# Altium PCB PCB_Link screen_2022-08-21.pcbdoc
Units mil, origin at the board's own origin, x right, y up, seen from the top; angles counter-clockwise.
Board outline 5110 x 2970 mil, 2 copper layers (Top Layer, Bottom Layer); 78 components, 68 nets, 294 pads, 133 vias.
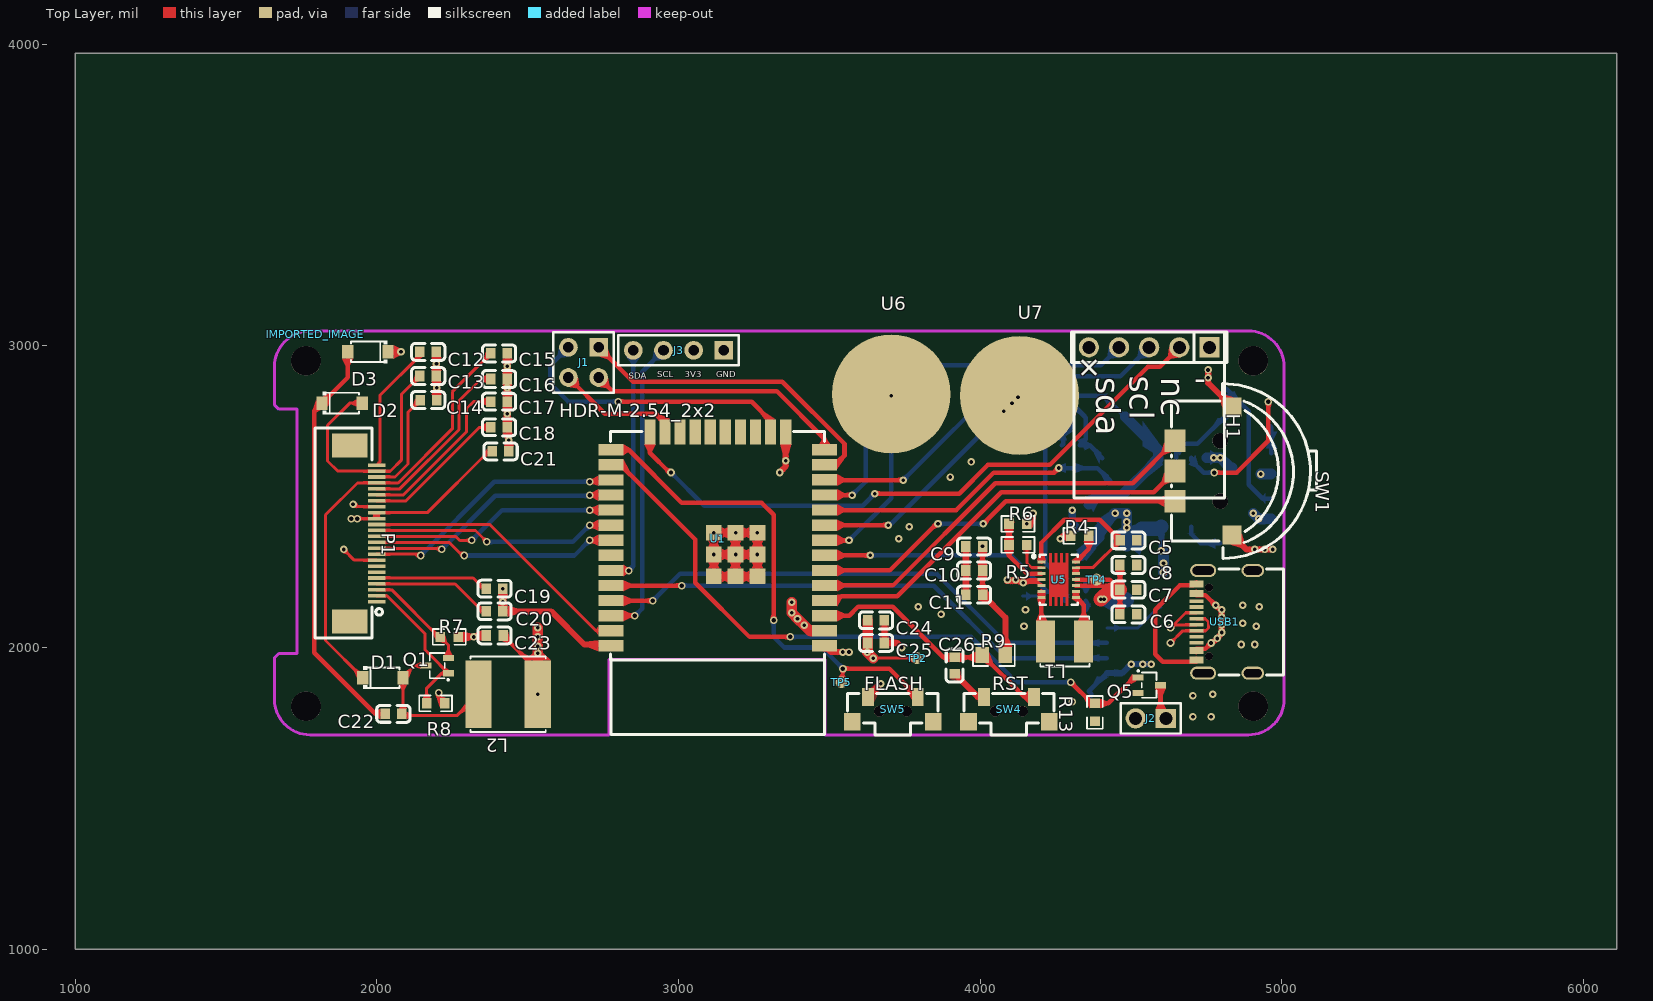
[diagram p0: Top Layer view]
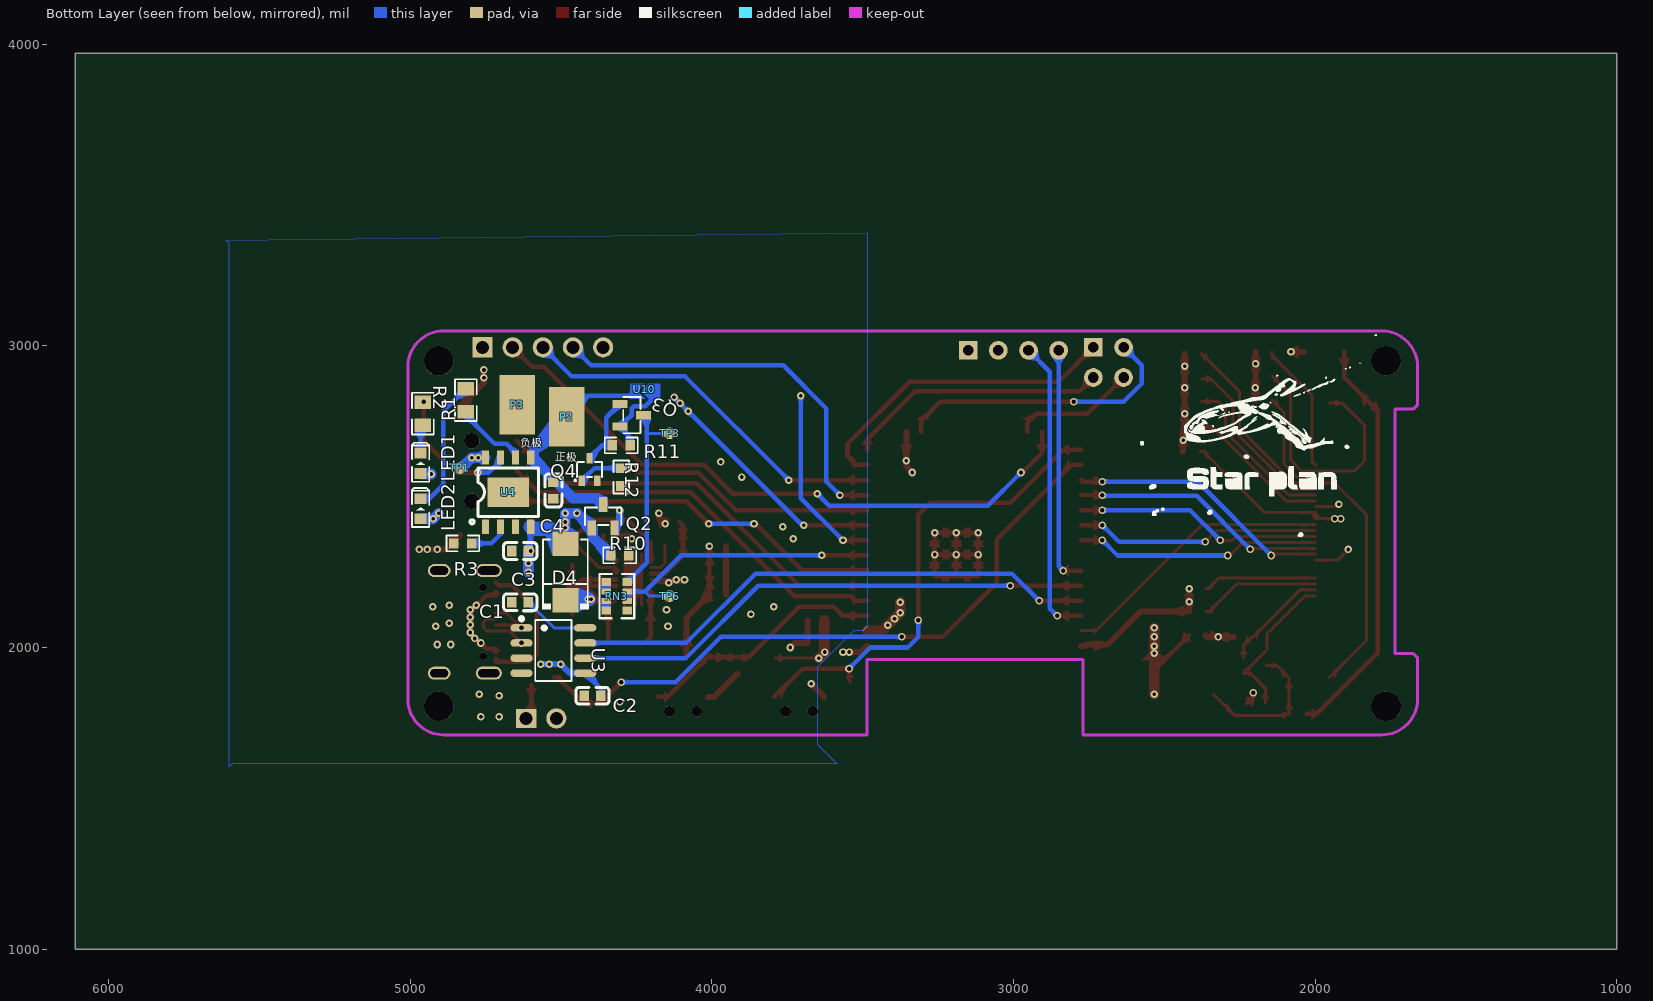
[diagram p1: Bottom Layer view, seen from below]

## Layer stack, top to bottom
Top Layer: signal copper (thickness not stored)
Dielectric: dielectric 12.6, FR-4, Dk 4.8
Bottom Layer: signal copper (thickness not stored)

## Board outline
6110,1000 1000,1000 1000,3970 6110,3970

## Components (designator, comment, footprint, x,y, rotation, side; value= is the part's Value field where it differs from the comment)
C1 "0.1u" C0603#1 4635,2150 r180 bottom
C2 "0.1u" C0603#1 4395,1840 r0 bottom
C3 "0.1u" C0603#1 4635,2320 r180 bottom
C4 "0.1u" C0603#1 4525,2520 r90 bottom
C5 "0.1u" C0603#2 4491.22,2355.03 r0 top
C6 "10u" C0603#2 4490.61,2110.03 r180 top
C7 "10u" C0603#2 4490.61,2191.77 r180 top
C8 "10u" C0603#2 4490.61,2273.51 r180 top
C9 "22u" C0603#2 3980,2335 r0 top
C10 "22u" C0603#2 3980,2255 r0 top
C11 "22u" C0603#2 3980,2175 r0 top
C12 "1u" C0603#2 2170,2980 r180 top
C13 "1u" C0603#2 2170,2900 r180 top
C14 "1u" C0603#2 2170.61,2820 r0 top
C15 "1u" C0603#2 2405,2975 r180 top
C16 "1u" C0603#2 2405,2890 r180 top
C17 "1u" C0603#2 2405,2815 r180 top
C18 "1u" C0603#2 2405,2730 r180 top
C19 "1u" C0603#2 2390,2195 r180 top
C20 "1u" C0603#2 2390,2120 r180 top
C21 "0.1u" C0603#2 2410,2650 r180 top
C22 "4.7u" C0603#2 2055,1780 r0 top
C23 "4.7u" C0603#2 2390.61,2040 r0 top
C24 "22u" C0603#2 3655,2090 r0 top
C25 "0.1u" C0603#2 3655,2015 r0 top
C26 "0.1u" C0603#2 3915,1940 r270 top
D1 "MBR0530_C232832" SOD-123_L2.8-W1.8-LS3.7-RD 2020,1900 r0 top
D2 "MBR0530_C232832" SOD-123_L2.8-W1.8-LS3.7-RD 1885,2810 r0 top
D3 "MBR0530_C232832" SOD-123_L2.8-W1.8-LS3.7-RD 1970,2980 r180 top
D4 "SS24_C266555" SMB_L4.6-W3.6-LS5.3-RD 4485,2250 r270 bottom
H1 "DS3231模块" DS3231模块 4510,2945 r270 top
IMPORTED_IMAGE "IMPORTED_IMAGE" IMPORTED_IMAGE 1795.63,3037.6 r0 top
J1 "HDR-M-2.54_2x2" HDR-M-2.54_2X2 2685,2945 r270 top
J2 "HDR-M-2.54_1x2" HDR-M-2.54_1X2 4565,1765 r180 top
J3 "OLED" HDR-M-2.54_1X4 3000,2985 r180 top
L1 "1.5uH" IND-SMD_L4.0-W4.0 4280,2020 r180 top
L2 "68uH" IND-SMD_L6.0-W6.0 2435,1845 r180 top
LED1 "LED-0603_R" LED0603_RED 4965,2610 r270 bottom
LED2 "LED-0603_G" LED0603_GREEN 4965,2460 r270 bottom
P1 "微雪电子 24pin 电子墨水屏幕底座  /FPC 0.5MM 24P" FPC-SMD_AFC07-S24FCC-00 1955,2377.93 r270 top
P2 "正极" 电池电极焊盘 4480,2765 r90 bottom
P3 "负极" 电池电极焊盘 4645,2805 r90 bottom
Q1 "WST3052" SOT-323-3_L2.1-W1.3-P1.30-LS2.3-BL#1 2200,1940 r90 top
Q2 "SI2305" SOT-23-3_L2.9-W1.3-P1.90-LS2.4-BR 4360,2435 r90 bottom
Q3 "SI2305" SOT-23-3_L2.9-W1.3-P1.90-LS2.4-BR 4265,2770 r180 bottom
Q4 "WST3052" SOT-323-3_L2.1-W1.3-P1.30-LS2.3-BL#2 4405,2590 r0 bottom
Q5 "WST3052" SOT-323-3_L2.1-W1.3-P1.30-LS2.3-BL#1 4560,1875 r270 top
R1 "1k" R0805#1 4957.63,2775 r270 bottom
R2 "1k" R0805#1 4815,2820 r90 bottom
R3 "1.2k" R0603#1 4825,2345 r0 bottom
R4 "1M" R0603#2 4330,2370 r0 top
R5 "180k" R0603#2 4125,2340 r0 top
R6 "1M" R0603#2 4125,2410 r180 top
R7 "3R" R0603#2 2240,2035 r0 top
R8 "1k" R0603#2 2195,1815 r0 top
R9 "1k" R0805#2 4045,1975 r180 top
R10 "10k" R0603#1 4305,2305 r180 bottom
R11 "180k" R0603#1 4300,2670 r0 bottom
R12 "10k" R0603#1 4300,2565 r90 bottom
R13 "10k" R0603#2 4380,1785 r270 top
RN3 "10K" RES-ARRAY-SMD_0603-8P-L3.2-W1.6-BL 4315,2170 r90 bottom
SW1 "K1-1502SA-01" KEY-SMD_K1-1502SA-01 4740,2585 r270 top
SW4 "RST" SW-SMD_1TS002G-XXXX-3500-CT 4095,1795 r0 top
SW5 "FLASH" SW-SMD_1TS002G-XXXX-3500-CT 3710,1795 r0 top
TP1 "测试点" 检测点#1 4840,2595 r0 bottom
TP2 "测试点" 检测点#2 3785,1965 r0 top
TP3 "测试点" 检测点#1 4145,2710 r0 bottom
TP4 "测试点" 检测点#2 4380,2225 r0 top
TP5 "测试点" 检测点#2 3535,1885 r0 top
TP6 "测试点" 检测点#1 4145,2170 r0 bottom
U1 "ESP32-WROOM-32E-N16" WIFI-SMD_ESP32-WROOM-32E 3130,2360 r90 top
U3 "CH340N_C2977777" SOP-8_L4.9-W3.9-P1.27-LS6.0-BL 4525,1990 r90 bottom
U4 "TP4056" ESOP-8_L4.9-W3.9-P1.27-LS6.0-BL-EP 4675,2515 r0 bottom
U5 "TPS63020DSJR" VSON-14_L4.0-W3.0-P0.50-BL-EP_TI_DSJ 4260,2225 r270 top
U6 "触摸焊盘" 触摸焊盘 3705,2840 r0 top
U7 "触摸焊盘" 触摸焊盘 4130,2835 r0 top
U10 "短接焊盘" 短接焊盘 4270,2875 r0 bottom
USB1 "TYPEC-304YDSW-ACP16" USB-C-SMD_TYPEC-304YDSW-ACP16 4810,2085 r90 top

## Footprints (in the part's own frame and the unit in brackets; to place one, negate y for a bottom-side part, rotate by r counter-clockwise, add the part's x,y. Pads: shape width x height; smd on the part's side, far side on the other; paste and mask are expansions set on the pad)
C0603#1 [mm]
  rect 0.8x0.9 smd: 1(0.7,0) 2(-0.7,0)
  silkscreen extent -1.39,-0.72 1.41,0.71
C0603#2 [mm]
  rect 0.8x0.9 smd: 1(-0.7,0) 2(0.7,0)
  silkscreen extent -1.41,-0.71 1.39,0.72
DS3231模块 [mm]
  rect 1.7x1.7 hole 1.1: 1(-1.27,6.35)
  round 1.7 hole 1.1: 2(-1.27,3.81) 3(-1.27,1.27) 4(-1.27,-1.27) 5(-1.27,-3.81)
  silkscreen extent -2.54,-5.29 11.43,7.83
ESOP-8_L4.9-W3.9-P1.27-LS6.0-BL-EP [mm]
  rect 0.6x1.2 smd: 1(1.905,2.908) 2(0.635,2.908) 3(-0.635,2.908) 4(-1.905,2.908) 5(-1.905,-2.908) 6(-0.635,-2.908) 7(0.635,-2.908) 8(1.905,-2.908)
  rect 3.5x2.5 smd: 9(0,0)
  silkscreen extent -2.55,-2.05 3.2,2.67
FPC-SMD_AFC07-S24FCC-00 [mm]
  rect 0.3x1.5 smd: 1(5.745,1.129) 2(5.245,1.129) 3(4.746,1.129) 4(4.245,1.129) 5(3.746,1.129) 6(3.245,1.129) 7(2.746,1.129) 8(2.245,1.129) 9(1.746,1.129) 10(1.245,1.129) 11(0.746,1.129) 12(0.245,1.129) 13(-0.254,1.129) 14(-0.755,1.129) 15(-1.251,1.13) 16(-1.754,1.13) 17(-2.254,1.128) 18(-2.754,1.129) 19(-3.254,1.129) 20(-3.756,1.132) 21(-4.256,1.132) 22(-4.756,1.132) 23(-5.256,1.132) 24(-5.756,1.132)
  rect 2x3 smd: 25(-7.401,-1.132) 26(7.401,-1.125)
  silkscreen extent -8.89,-4.07 8.8,1.61
HDR-M-2.54_1X2 [mm]
  rect 1.7x1.575 hole 1.1: 1(-1.27,0)
  round 1.7 hole 1.1: 2(1.27,0)
  silkscreen extent -2.54,-1.27 2.54,1.27
HDR-M-2.54_1X4 [mil]
  rect 62x62 hole 35: 1(-150,0)
  round 62 hole 35: 2(-50,0) 3(50,0) 4(150,0)
  silkscreen extent -200,-50 200,50
HDR-M-2.54_2X2 [mil]
  rect 62x62 hole 35: 1(-50,50)
  round 62 hole 35: 2(50,50) 3(-50,-50) 4(50,-50)
  silkscreen extent -100,-100 100,100
IMPORTED_IMAGE [mil]
IND-SMD_L4.0-W4.0 [mm]
  rect 1.6x3.5 smd: 1(-1.6,0) 2(1.6,0)
  silkscreen extent -2.08,-2.1 2.08,2.1
IND-SMD_L6.0-W6.0 [mm]
  rect 2.2x5.72 smd: 1(-2.5,0) 2(2.5,0)
  silkscreen extent -3.18,-3.18 3.18,3.18
KEY-SMD_K1-1502SA-01 [mm]
  rect 1.9x1.8 smd: 1(-2.54,-2.4) 2(2.54,-2.4) T(0,-2.4)
  rect 1.6x1.6 smd: 5(-5.4,2.4) C(5.4,2.4)
  round 1.3 hole 1.3 unplated: ""(-2.54,1.4) ""(2.54,1.4)
  silkscreen extent -7.35,-2.7 7.35,9.5
LED0603_GREEN [mm]
  rect 0.9x1 smd: 1(0.85,0) 2(-0.85,0)
  silkscreen extent -1.75,-0.73 1.54,0.73
LED0603_RED [mm]
  rect 0.9x1 smd: 1(0.85,0) 2(-0.85,0)
  silkscreen extent -1.75,-0.73 1.54,0.73
R0603#1 [mil]
  rect 31.75x34.02 smd: 1(29.65,0) 2(-29.65,0)
  silkscreen extent -55,-26 55,26
R0603#2 [mil]
  rect 31.75x34.02 smd: 1(-29.65,0) 2(29.65,0)
  silkscreen extent -55,-26 55,26
R0805#1 [mil]
  rect 44.59x54.21 smd: 1(38.04,0) 2(-38.04,0)
  silkscreen extent -69,-36 69,36
R0805#2 [mil]
  rect 44.59x54.21 smd: 1(-38.04,0) 2(38.04,0)
  silkscreen extent -69,-36 69,36
RES-ARRAY-SMD_0603-8P-L3.2-W1.6-BL [mm]
  rect 0.65x0.8 smd: 1(1.2,0.9) 4(-1.2,0.9) 5(-1.2,-0.9) 8(1.2,-0.9)
  rect 0.5x0.8 smd: 2(0.4,0.9) 3(-0.4,0.9) 6(-0.4,-0.9) 7(0.4,-0.9)
  silkscreen extent -1.87,-1.47 1.87,1.45
SMB_L4.6-W3.6-LS5.3-RD [mil]
  rect 80.61x86.31 smd: 1(92.94,0) 2(-92.94,0)
  silkscreen extent -108,-77 123,77
SOD-123_L2.8-W1.8-LS3.7-RD [mm]
  rect 0.95x1.15 smd: 1(-1.693,0) 2(1.693,0)
  silkscreen extent -1.63,-0.94 1.41,0.94
SOP-8_L4.9-W3.9-P1.27-LS6.0-BL [mm]
  oval 0.63x1.865 smd: 1(1.905,2.682) 2(0.635,2.682) 3(-0.635,2.682) 4(-1.905,2.682) 5(-1.905,-2.682) 6(-0.635,-2.682) 7(0.635,-2.682) 8(1.905,-2.682)
  silkscreen extent -2.58,-1.52 2.82,2.83
SOT-23-3_L2.9-W1.3-P1.90-LS2.4-BR [mm]
  rect 1.25x0.7 smd: 1(-1,0.95) 2(-1,-0.95) 3(1,0)
  silkscreen extent -0.73,-1.53 0.73,1.53
SOT-323-3_L2.1-W1.3-P1.30-LS2.3-BL#1 [mm]
  rect 0.525x0.919 smd: 1(-0.65,-0.95) 2(0.65,-0.95) 3(0,0.95)
  silkscreen extent -1.27,-0.99 1.06,0.62
SOT-323-3_L2.1-W1.3-P1.30-LS2.3-BL#2 [mm]
  rect 0.525x0.919 smd: 1(0.65,0.95) 2(-0.65,0.95) 3(0,-0.95)
  silkscreen extent -1.06,-0.62 1.27,0.99
SW-SMD_1TS002G-XXXX-3500-CT [mm]
  rect 1x1.5 smd: 1(-2.1,1.05) 2(2.1,1.05)
  rect 1.4x1.45 smd: 3(-3.4,-1.05) 4(3.4,-1.05)
  round 0.9 hole 0.9 unplated: ""(-1.15,-0.15) ""(1.15,-0.15)
  silkscreen extent -3.8,-2.15 3.8,1.35
USB-C-SMD_TYPEC-304YDSW-ACP16 [mm]
  oval 1.1x2.2 hole 0.7 slot 1.8 at 90 deg: 17(-4.32,1.808) 20(4.32,1.808)
  oval 1.1x1.9 hole 0.7 slot 1.5 at 90 deg: 18(-4.32,-2.373) 19(4.32,-2.373)
  rect 0.3x1.15 smd: A1(-3.35,2.373) A4(-2.55,2.373) A5(-1.25,2.373) A6(-0.25,2.373) A7(0.25,2.373) A8(1.25,2.373) A9(2.55,2.372) A12(3.35,2.373) B1(3.05,2.373) B4(2.25,2.372) B5(1.75,2.373) B6(0.75,2.373) B7(-0.75,2.373) B8(-1.75,2.373) B9(-2.25,2.373) B12(-3.05,2.373)
  round 0.65 hole 0.65 unplated: ""(-2.89,1.308) ""(2.89,1.308)
  silkscreen extent -4.47,-4.97 4.47,0.49
VSON-14_L4.0-W3.0-P0.50-BL-EP_TI_DSJ [mm]
  rect 0.25x0.7 smd: 1(-1.5,-1.45) 2(-1,-1.45) 3(-0.5,-1.45) 4(0,-1.45) 5(0.5,-1.45) 6(1,-1.45) 7(1.5,-1.45) 8(1.5,1.45) 9(1,1.45) 10(0.5,1.45) 11(0,1.45) 12(-0.5,1.45) 13(-1,1.45) 14(-1.5,1.45)
  round 0 smd: 15(0,0)
  Top Layer region: -2.2,0.79 -2.2,0.59 -1.43,0.59 -1.43,0.33 -2.2,0.33 -2.2,0.13 -1.43,0.13 -1.43,-0.13 -2.2,-0.13 -2.2,-0.33 -1.43,-0.33 -1.43,-0.59 -2.2,-0.59 -2.2,-0.79 2.2,-0.79 2.2,-0.59 1.43,-0.59 1.43,-0.33 2.2,-0.33 2.2,-0.13 1.43,-0.13 1.43,0.13 2.2,0.13 2.2,0.33 1.43,0.33 1.43,0.59 2.2,0.59 2.2,0.79
  silkscreen extent -2.1,-2.23 2.1,1.6
WIFI-SMD_ESP32-WROOM-32E [mm]
  rect 0.95x2.1 smd: 1(-9.002,-9) 2(-7.732,-9) 3(-6.462,-9) 4(-5.192,-9) 5(-3.922,-9) 6(-2.652,-9) 7(-1.382,-9) 8(-0.112,-9) 9(1.158,-9) 10(2.428,-9) 11(3.698,-9) 12(4.968,-9) 13(6.238,-9) 14(7.508,-9) 25(7.507,9) 26(6.237,9) 27(4.967,9) 28(3.697,9) 29(2.427,9) 30(1.157,9) 31(-0.113,9) 32(-1.383,9) 33(-2.653,9) 34(-3.923,9) 35(-5.193,9) 36(-6.463,9) 37(-7.733,9) 38(-9.003,9)
  rect 2.1x0.95 smd: 15(9.002,-5.715) 16(9.002,-4.445) 17(9.002,-3.175) 18(9.002,-1.905) 19(9.002,-0.635) 20(9.002,0.635) 21(9.002,1.905) 22(9.002,3.175) 23(9.002,4.445) 24(9.002,5.715)
  rect 1.33x1.33 smd: 39(-3.153,-1.5) 39(-3.153,0.335) 39(-3.153,-3.335) 39(-1.318,-1.5) 39(-1.318,0.335) 39(-1.318,-3.335) 39(0.517,0.335) 39(0.517,-1.5) 39(0.517,-3.335)
  silkscreen extent -16.48,-9 9.02,9.02
检测点#1 [mm]
  round 1 smd: 1(-0.127,0)
检测点#2 [mm]
  round 1 smd: 1(0.127,0)
电池电极焊盘 [mm]
  rect 5x3 smd: 1(0,0)
短接焊盘 [mil]
  round 0 smd: 1(-25,12.5) 2(-68.12,25)
  Top Layer region: 0,0 -50,0 -25,25 -50,50 0,50
  Top Layer region: -61.25,0 -36.25,25 -61.25,50 -100,50 -100,25 -100,0
触摸焊盘 [mil]
  round 393.7 smd: 1(0,0)

## Free pads (board coordinates)
  round 98.43 hole 98.43 unplated: ""(1765,1805) ""(1765,2950) ""(4905,1805) ""(4905,2950)

## Via types
v1: diameter 25, hole 12, Top Layer to Bottom Layer, tented both sides, 106 vias
v2: diameter 25, hole 15, Top Layer to Bottom Layer, tented both sides, 27 vias

## Nets (pads, with @x,y where several pads share a name; then routed paths per layer and width w, separated by ;. In a path a pad name is that pad's centre, name@x,y a point inside that pad or via, vN(x,y) a via of type N, cw(c..) or ccw(c..) an arc to the next point about the centre after c; other vN are vias at no path point)
3V3: C9.2 C10.2 C11.2 C21.2 C23.2 C24.1 C25.1 H1.5 J2.2 J3.2 L2.1 P1.15 P1.16 R4.1 R6.1 R9.1 SW1.5 SW1.C TP2.1 U1.2 U5.4 U5.5 | length 2534.8
  Top Layer w10: v2(1915,2427.16) v2(1935,2427.16) ; v2(1935,2427.16) P1.15 P1.16 2167,2447 2370,2650 C21.2 ; v1(3645,1965) 3785,1965 TP2.1 ; v1@4085,2215 v1(4142.59,2215) 4193.2,2215 U5.5 ; v1@4085,2225 v1(4118,2225) U5.4
  Top Layer w15: C23.2 2533.4,1924.7 v1(2533.4,1845) ; C11.2 C10.2 v1(4007.6,2335)
  Top Layer w20: C11.2 4083,2099.5 R9.1 ; v1(4154.7,2410) 4174.7,2430 v1(4175,2445) ; v1(4265,2360) 4275,2370 R4.1 ; v1(4755,2920) v1(4755,2893.51) 4755,2877.1 SW1.5 ; SW1.C 4881.9,2325 v1(4909.48,2325) v1(4942.44,2325) v1(4970,2325)
  Top Layer w35: v1(2533.4,1845) v1(2533.43,1980.48) ; v1(2533.43,1980.48) v1(2533.43,2004.76) v1(2533.43,2036.19) v1(2533.43,2065) ; v1(3375,2150) v1(3375,2114.9) v1(3394.26,2095.64) v1(3416.01,2073.89) 3434.3,2055.6 U1.2 ; C24.1 C25.1 3627.4,1987.4 v1(3625,1985) ; v1(3625,1985) v1(3645,1965) v1(3625,1985)
  other v1: 4090.37,2225
BAT: C4.1 P2.1 Q2.3 U4.5 U10.1 | length 743.1
  Bottom Layer w15: U10.1 4272.5,2835 4410,2835 P2.1
  Bottom Layer w35: Q2.3 4380,2494.4 4460,2494.4 U4.5@4590,2624.4 ; P2.1 4590,2655 U4.5@4590,2635
D2_1: C22.1 D2.1 D3.2 | length 1362.4
  Top Layer w15: D3.2 1903.4,2895 D2.1 1792.3,2784 1792.3,1982.7 1995,1780 C22.1
D+: U3.1 USB1.A6 USB1.B6 | length 196.7
  Top Layer w10: USB1.A6 4640.8,2075.2 v2(4630.61,2065) 4680.1,2114.5 USB1.B6
D-: U3.2 USB1.A7 USB1.B7 | length 211.1
  Top Layer w10: v2(4630.61,2015) 4671.1,2055.5 USB1.B7 4746.6,2054.8 4756.6,2064.8 4756.6,2084.8 4746.6,2094.8 USB1.A7
GDR: P1.2 Q1.1 R8.1 | length 518.1
  Top Layer w10: P1.2 2033.6,2171.4 2160,2045 2160,1991.8 Q1.1 2214.8,1914.4 2165.3,1865 R8.1
GND: C1.2 C2.1 C3.2 C4.2 C5.2 C6.1 C7.1 C8.1 C9.1 C10.1 C11.1 C12.1 C13.1 C14.2 C15.1 C16.1 C17.1 C18.1 C19.1 C20.1 C21.1 C23.1 C24.2 C25.2 C26.2 D3.1 H1.1 J3.1 P1.8 P1.17 P3.1 Q4.2 Q5.2 R3.1 R5.2 R7.2 R8.2 R10.1 R12.2 R13.2 RN3.5 SW4.1 SW5.1 U1.1 U1.15 U1.38 U1.39 U3.3 U4.1 U4.3 U4.9 U5.2 U5.15 USB1.17 USB1.18 USB1.19 USB1.20 USB1.A1 USB1.A12 USB1.B1 USB1.B12 | length 3541.7
  Top Layer w10: v1(1890,2325) 1925.5,2289.5 P1.8 ; v1@1915,2475 v1(1921.11,2475) 1929.4,2466.7 P1.17 ; R5.2 4154.7,2280.3 4170,2265 U5.2
  Top Layer w15: v2(2205,1850) 2205,1834.7 R8.2 ; USB1.B12@4716.6,1963.1 USB1.A1 4605.1,1953.1 4580,1978.2 4580,2125 4661.9,2206.9 4706.6,2206.9 USB1.A12 ; v1(3116.8,2308.1) 3116.8,2235.8 U1.39@3189.1,2235.8 ; v1(3116.8,2308.1) v1(3116.8,2380.3) v1(3189.1,2380.3) ; v1(3116.8,2308.1) 3189,2308.1 v1(3189.1,2380.3) ; U1.39@3189.1,2235.8 v1(3189.1,2308.1) v1(3261.3,2308.1) ; U1.39@3189.1,2235.8 3261.3,2235.8 v1(3261.3,2308.1) ; v1(3189.1,2380.3) v1(3261.3,2380.3) v1(3261.3,2308.1)
  Top Layer w20: D3.1 v1(2080,2980) ; C12.1 v1(2197.56,2940.04) C13.1 v1(2197.89,2861.54) C14.2 ; R7.2 v1(2321.56,2035) 2358.1,2035 C23.1 ; v1(2417.56,2195) v1(2417.56,2151.63) C20.1 2577.6,2120 2687.6,2010 2757.6,2010 2762,2005.6 U1.38 ; C15.1 v1(2432.56,2932.87) C16.1 v1(2432.56,2860.87) C17.1 v1(2432.56,2774.2) C18.1 2437.6,2725 v1(2437.56,2687.53) C21.1 ; v1(3335,2580) 3355,2600 v1(3355,2618.54) ; v1(3355,2618.54) U1.15 ; U1.1 3504.9,1985 v1(3544.76,1985) ; v1(3544.76,1985) v1(3565,1985) ; SW5.1 v1(3670,1880) ; C24.2 C25.2 3725,2015 v1(3740,2000) ; C26.2 3991.1,1836.3 SW4.1 ; C11.1 C10.1 C9.1
  other v1: 4705,1770 4765,1770 4705,1840 4770,1845 4865,2010 4910,2010 4145,2070 4915,2070 4870,2080 3870,2110 4150,2125 3795,2135 4925,2135 4870,2140 3730,2360 3765,2400 3900,2565 3970,2615
  other v2: 4305,1820
IO2: H1.2 U1.24 | length 2114.3
  Top Layer w15: U1.24 2905,2645 2970,2580 v1(2975,2580) ; v1(3650,2510) 3930,2510 4025,2605 4230,2605 4554.96,2929.96 4594.96,2929.96 H1.2
  Bottom Layer w15: v1(2975,2580) 3085,2470 3610,2470 v1(3650,2510)
IO4: Q5.1 R13.1 U1.26 | length 2193.7
  Top Layer w15: U1.26 2807.4,2605.6 3055,2358 3055,2215.2 3235.2,2035 v2(3370,2035) ; v2(4300,1885) 4370.3,1814.7 R13.1 4424.7,1814.7 4510.6,1900.6 Q5.1
  Bottom Layer w15: v2(3370,2035) 3970,2035 4120,1885 v2(4300,1885)
IO5(CS): P1.12 U1.29 | length 823.2
  Top Layer w10: P1.12 2261.7,2368.3 2275,2355 v2(2315,2355)
  Top Layer w15: v2(2705,2455) U1.29
  Bottom Layer w15: v2(2315,2355) 2415,2455 v2(2705,2455)
IO12: J1.2 U1.14 | length 869
  Top Layer w15: J1.2 2780,2850 3325,2850 3484.3,2690.7 U1.14
IO13: J1.3 U1.16 | length 963.6
  Top Layer w15: v2(2800,2815) 3242.4,2815 3305,2752.4 U1.16
  Bottom Layer w15: J1.3 2575,2935 2575,2875 2635,2815 v2(2800,2815)
IO14: J1.1 U1.13 | length 1065.4
  Top Layer w15: J1.1 2849,2881 3344,2881 3550,2675 3550,2635 3520.6,2605.6 U1.13
IO15: J1.4 U1.23 | length 412.7
  Top Layer w15: J1.4 2755,2775 2925,2775 2955,2745 U1.23
IO16(BUSY): P1.9 U1.27 | length 881.6
  Top Layer w10: P1.9 2140.8,2309.2 v2(2145,2305)
  Top Layer w15: v2(2705,2550) 2770.1,2550 U1.27
  Bottom Layer w15: v2(2145,2305) 2389.5,2549.5 v2(2705,2550)
IO17(RST): P1.10 U1.28 | length 852.5
  Top Layer w10: P1.10 2211.1,2328.9 v2(2215,2325)
  Top Layer w15: v2(2705,2505) U1.28
  Bottom Layer w15: v2(2215,2325) 2392.49,2502.49 2702.49,2502.49 v2(2705,2505)
IO18(CLK): P1.13 U1.30 | length 814.8
  Top Layer w10: P1.13 2327.1,2387.9 v2(2365,2350)
  Top Layer w15: v2(2705,2405) U1.30
  Bottom Layer w15: v2(2365,2350) 2650,2350 v2(2705,2405)
IO19(D/C): P1.11 U1.31 | length 815.1
  Top Layer w10: P1.11 2239.4,2348.6 2283,2305 v2(2290,2305)
  Top Layer w15: v2(2705,2355) U1.31
  Bottom Layer w15: v2(2290,2305) 2655,2305 v2(2705,2355)
IO21(SDA): J3.4 U1.33 | length 795.5
  Top Layer w15: U1.33@2775.7,2255 v2(2835,2255)
  Bottom Layer w15: v2(2835,2255) 2850,2270 J3.4
IO22(SCL): J3.3 U1.36 | length 998.7
  Top Layer w15: U1.36 v2@2855,2105.6
  Bottom Layer w15: v2(2855,2105) 2879.19,2129.19 2879.19,2914.19 J3.3
IO23(SDI): P1.14 U1.37 | length 922.1
  Top Layer w10: P1.14 2374.5,2407.6 2726.5,2055.6 U1.37
IO25: Q4.1 R12.1 U1.10 | length 1021.5
  Top Layer w15: U1.10 3920.6,2455.6 4045,2580 4245,2580 v1(4260,2595)
  Bottom Layer w15: v1@4260,2594.7 R12.1 4388.5,2594.7 Q4.1
IO26: H1.4 U1.11 | length 1320.5
  Top Layer w15: U1.11@3484.3,2505 v1(3575,2505)
  Bottom Layer w15: v1(3575,2505) 3620,2550 3620,2792 3762.8,2935 4400,2935 H1.4
IO27: H1.3 U1.12 | length 1258
  Top Layer w15: U1.12@3484.3,2555 v1(3745,2555)
  Bottom Layer w15: v1(3745,2555) 4088.5,2898.5 4463.5,2898.5 H1.3
IO32: U1.8 U6.1 | length 618.9
  Top Layer w15: U1.8 3484.9,2355 v1(3565,2355)
  Bottom Layer w15: v1(3565,2355) 3705,2495 v1(3705,2835)
IO33: U1.9 U7.1 | length 817
  Top Layer w15: U1.9 3694.4,2405.6 v1(3695,2405)
  Bottom Layer w15: v1(3695,2405) 3700,2405 v1(4077.97,2782.97) 4097.32,2802.32 v1(4105.13,2810.13) v1(4125,2830)
  other v1: 4125,2830
IO34: SW1.2 U1.6 | length 1256.2
  Top Layer w15: U1.6 3700.6,2255.6 3855,2410 v1(3860,2410) ; v1(4010,2410) 4085,2485 SW1.2
  Bottom Layer w15: v1(3860,2410) v1(4010,2410)
IO35: RN3.6 RN3.7 TP6.1 U1.7 | length 953.4
  Top Layer w15: U1.7 v1(3635,2305.57)
  Bottom Layer w10: TP6.1 4206.5,2170 4221.5,2185
  Bottom Layer w15: v1(3635,2305.57) 4100.9,2305.6 4221.5,2185 RN3.7@4270,2185 ; RN3.6@4279.6,2154.3 RN3.7@4279.6,2184.3
IO36: SW1.T U1.4 | length 1339.1
  Top Layer w15: U1.4 3525.6,2155.6 3540,2170 3725,2170 4070,2515 4575.5,2515 SW1.T
IO39: SW1.1 U1.5 | length 1359.8
  Top Layer w15: U1.5 3710.6,2205.6 4050,2545 4505.5,2545 SW1.1
J2_1: J2.1 Q5.3 | length 117.3
  Top Layer w15: Q5.3 4597.4,1782.6 J2.1
P1_4: C20.2 P1.4 | length 400.6
  Top Layer w10: P1.4 2259.4,2210.8 2350.2,2120 C20.2
P1_5: C19.2 P1.5 | length 377.7
  Top Layer w10: P1.5 2319.4,2230.5 2354.9,2195 C19.2
P1_18: C18.2 P1.18 | length 478.9
  Top Layer w10: P1.18 2096.3,2486.3 2340,2730 C18.2
P1_19: C17.2 P1.19 | length 551.4
  Top Layer w10: P1.19 2088.5,2506 2297.4,2715 2297.4,2792.4 2320,2815 C17.2
P1_20: C16.2 P1.20 | length 584.5
  Top Layer w10: P1.20 2076.2,2525.8 2272.5,2722.1 2272.5,2817.5 2345,2890 C16.2
P1_22: C14.1 P1.22 | length 349.7
  Top Layer w10: P1.22 2060.2,2565.2 2103,2608 2103,2780 C14.1@2143,2820
P1_24: C12.2 P1.24 | length 434.5
  Top Layer w10: P1.24 2010,2615 2010,2835 2142.4,2967.4 C12.2
POWER: C6.2 C7.2 C8.2 D4.1 Q2.2 TP4.1 U5.10 U5.11 | length 1028.3
  Top Layer w15: U5.10 4449.5,2205.3 C7.2 ; U5.11 4429.8,2225 C7.2 ; C7.2@4463,2191.8 C8.2@4463,2273.5 ; C6.2 C7.2
  Top Layer w48: v1(4400,2160) 4430,2190 4461.3,2190 C7.2
  Mid-Layer 1 w48: v1(4305,2455) 4400,2360 v1(4400,2160)
  Bottom Layer w25: v1(4305,2455) 4305,2413.2 Q2.2
  Bottom Layer w48: v1(4410,2160) 4482.1,2160 D4.1
PREVGH: C15.2 D1.1 P1.21 | length 1431.9
  Top Layer w10: D1.1 1830,2023.4 1830,2440 1935.5,2545.5 P1.21 2070.5,2545.5 2250,2725 2250,2847.6 C15.2
PREVGL: C13.2 D2.2 P1.23 | length 841.3
  Top Layer w10: D2.2 1910,2810 1836.6,2736.6 1836.6,2618.4 1870.1,2584.9 P1.23 2044.9,2584.9 2082.4,2622.4 2082.4,2840 C13.2
Q1_3: C22.2 D1.2 L2.2 Q1.3 | length 499.3
  Top Layer w10: Q1.3 2126.6,1940 D1.2 2086.6,1784.1 C22.2 2091.6,1780 2096.6,1775 2266.6,1775 L2.2
Q3_1: Q3.1 Q4.3 R11.1 | length 257.6
  Bottom Layer w15: Q3.1 4350,2761.8 4350,2690.3 R11.1 4362.4,2670 Q4.3
Q3_2: Q3.2 R11.2 U10.2 | length 259.1
  Bottom Layer w15: 4200,2850 4200,2820 4220,2800 4257,2800 4264.4,2792.6 4264.4,2772.6 Q3.2 4274.4,2702.6 4274.4,2674 R11.2
R1_1: LED1.2 R1.1 | length 96.6
  Bottom Layer w15: R1.1 4965,2729.6 LED1.2
R2_1: LED2.2 R2.1 | length 443.3
  Bottom Layer w15: R2.1 4890,2783 4890,2540 4936.5,2493.5 LED2.2
RESE: P1.3 Q1.2 R7.1 | length 356.2
  Top Layer w10: P1.3 2049.4,2191.1 2205.5,2035 R7.1 2237.4,2007.9 Q1.2
RN3_1: RN3.1 RN3.2 | length 31.5
  Bottom Layer w15: RN3.2@4350.4,2185.7 RN3.1
RN3_3: RN3.3 RN3.4 | length 31.5
  Bottom Layer w15: RN3.4 RN3.3
RXD0: U1.34 U3.6 | length 1743.1
  Top Layer w15: U1.34@2775.7,2205 v2(3010,2205)
  Bottom Layer w15: v2(3010,2205) 3845.5,2205 4085.5,1965 U3.6
S$10066: 
S$10070: 
S$10284: 
S$10291: 
TP3_1: Q3.3 RN3.8 TP3.1 | length 659.1
  Bottom Layer w10: TP3.1 4215.6,2710
  Bottom Layer w15: Q3.3 4215.6,2760 4215.6,2281.2 RN3.8
TXD0: U1.35 U3.7 | length 1776.2
  Top Layer w15: U1.35@2775.7,2155 v2(2915,2155)
  Bottom Layer w15: v2(2915,2155) 3005,2245 3855.1,2245 4085.1,2015 U3.7
U1_3: C26.1 R9.2 SW4.2 U1.3 | length 835.4
  Top Layer w15: U1.3 3565.5,2105.6 3595,2135 3710,2135 3877.4,1967.6 C26.1 3999.5,1967.6 R9.2 4145.6,1836.3 SW4.2
U1_25: SW5.2 TP5.1 U1.25 | length 1640.7
  Top Layer w10: TP5.1 3545,1890 v2(3545,1930)
  Top Layer w15: U1.25 2834.4,2655.6 3010,2480 3275,2480 3315,2440 v2(3315,2090) ; v2(3545,1930) 3699,1930 SW5.2
  Bottom Layer w15: v2(3315,2090) 3315,2035 3350,2000 3475,2000 v2(3545,1930)
U3_8: C1.1 U3.8 | length 223.2
  Bottom Layer w10: U3.8 4522.4,2065 C1.1
U4_2: R3.2 U4.2 | length 133.2
  Bottom Layer w15: U4.2 4700,2375 4730,2345 R3.2
U4_6: R2.2 U4.6 | length 244.3
  Bottom Layer w15: U4.6 4650,2645 4680,2675 4720,2675 4815,2770 R2.2
U4_7: R1.2 U4.7 | length 484.8
  Top Layer w15: v2(4775,2580) 4850,2580 4955,2685 v2(4955,2815)
  Bottom Layer w15: U4.7 4700,2620 4740.5,2579.5 v2(4775,2580) ; 4757.5,2580 4772.5,2580 4757.5,2580
U5_1: C5.1 U5.1 U5.12 U5.13 | length 587.9
  Top Layer w10: U5.12 U5.13@4317.1,2264.7 ; U5.13 4373,2264.4 C5.1
  Top Layer w15: U5.1 4202.9,2347.9 4277.9,2422.9 4395.8,2422.9 C5.1
U5_3: R5.1 R6.2 U5.3 | length 246.9
  Top Layer w15: R6.2@4105.3,2415 4095.3,2405 R5.1 4095.3,2304.7 4155.3,2244.7 U5.3
U5_6: L1.2 U5.6 U5.7 | length 171.4
  Top Layer w15: U5.6 U5.7 4202.9,2034.1 L1.2
U5_8: L1.1 U5.8 U5.9 | length 176.3
  Top Layer w10: U5.8 U5.9
  Top Layer w15: U5.8 4343,2140 L1.1
U5_14: R4.2 U5.14 | length 103.6
  Top Layer w15: U5.14 4359.7,2326.6 R4.2
VCC: C2.2 C3.1 D4.2 LED1.1 LED2.1 Q2.1 R10.2 TP1.1 U3.5 U4.4 U4.8 USB1.A4 USB1.A9 USB1.B4 USB1.B9 | length 3170.4
  Top Layer w15: USB1.A4 USB1.B9 4746.4,1996.4 v1(4765,2015) 4770,2015 v1(4785,2030) ; USB1.A9 USB1.B4 4746.4,2173.6 v1(4780,2140) 4795,2125 v1(4800,2125) v1(4800,2100) v1(4800,2075) v1@4800,2045 ; v1(4800,2049.8) v1@4800,2045 ; v1(4785,2030) v1@4800,2045 ; v1(4785,2030) v1@4800,2045
  Mid-Layer 1 w10: v1(4607.44,2250) v1(4607.44,2279.68)
  Mid-Layer 1 w48: v1(4485,2396.68) 4615,2266.68 4615,2257.56 v1(4607.44,2250) ; v1@4495,1940 v1(4500,1945) v1(4538.67,1945) v1(4567.25,1945) ; v1(4607.44,2279.68) 4577.44,2249.68 4577.44,1955.19 v1(4567.25,1945) ; v1(4774.05,2629.5) 4784.05,2629.5 4794.05,2619.5 4874.05,2619.5 4918.55,2575 v1(4930,2575) ; v1(4785,2030) 4780,2025 4775,2025 v1(4765,2015) 4695,2015 4625,1945 v1(4567.25,1945)
  Mid-Layer 1 w50: v1(4446.8,2445) v1(4485,2445) ; v1(4485,2396.68) v1(4485,2416.18) ; v1(4800,2049.8) 4800,2139.8 4820,2159.8 4820,2323.06 v1(4923.47,2426.53) v1(4905,2445) 4925,2465 4925,2570 v1(4930,2575)
  Bottom Layer w15: C2.2 4367.4,1847 4359.4,1855 U3.5 ; U4.4 v1(4600,2320) C3.1
  Bottom Layer w20: U3.5 4470,1915 v1(4500,1945) v1(4538.67,1945) v1(4567.25,1945)
  Bottom Layer w35: R10.2 4394.7,2365 4394.7,2392.9 Q2.1 v1(4446.8,2445) ; v1@4445,2445 v1(4446.8,2445) ; D4.2 v1(4485,2396.68) v1(4485,2416.18) v1(4485,2445) 4466.8,2445 v1(4446.8,2445) ; v1(4607.44,2279.68) C3.1 ; v1(4607.44,2250) v1(4607.44,2279.68) ; U4.8 v1(4774.05,2629.5) ; v1(4774.05,2629.5) v1(4795,2629.5) 4829.5,2595 TP1.1 ; v1(4905,2445) v1(4923.47,2426.53) ; v1(4923.47,2426.53) LED2.1 ; v1(4930,2575) 4963.5,2575 LED1.1
  Bottom Layer w48: D4.2 4535,2392.9 4592.4,2392.9 U4.4
  other v1: 4500,1945
pads on no net: P1.1 P1.6 P1.7 P1.25 P1.26 SW1. SW4. SW4.3 SW4.4 SW5. SW5.3 SW5.4 U1.17 U1.18 U1.19 U1.20 U1.21 U1.22 U1.32 U3.4 USB1. USB1.A5 USB1.A8 USB1.B5 USB1.B8
copper on no net: | length 0

## Polygon pours and split planes (outlines as drawn)
GND on Bottom Layer (solid): 3485,3375 3485,2070 3500,2055 3530,2055 3650,1935 3650,1680 3585,1615 5590,1615 5600,1605 5600,3340 5610,3350
GND on Mid-Layer 2 (solid): 1520,3290 1520,1650 1500,1630 2480,1630 2520,1670 2520,1835 2575,1890 2585,1890 2745,2050 3550,2050 3550,1815 3600,1765 3600,1695 3780,1515 5270,1515 5500,1745 5500,3470
3V3 on Mid-Layer 1 (solid): 1565,3225 1565,1550 1575,1540 2530,1540 2570,1500 2570,1880 2780,2055 3430,2050 3660,1910 3660,1605 3665,1600 5325,1600 5375,1650 5375,3180 5405,3210
GND on Top Layer (solid): 3465,3180 3465,2195 3590,2070 3590,1590 3585,1585 5300,1585 5305,1580 5305,2980 5310,2985 5310,3185

## Keep-outs
Keep-Out Layer:
  lines w10: 1660.59,1828.58 ccw(c1778.7,1828.58) 1778.7,1710.47 ; 1660.59,2930.94 cw(c1778.7,2930.94) 1778.7,3049.05 ; 4888.93,1710.47 ccw(c4888.93,1828.58) 5007.04,1828.58 ; 4888.93,3049.05 cw(c4888.93,2930.94) 5007.04,2930.94
  lines w10 net S$10291: 2768.87,1710.47 cw(c2768.87,1708.87) 2770,1710 ; 4887.8,1710 ccw(c4887.8,1711.61) 4888.93,1710.47

## Other copper
Top Layer:
  drawing of 313 lines, arcs and shapes, not listed
Mid-Layer 1:
  region net VCC: 4598.07,2271.41 4616.82,2271.41 4612.44,2262.66 4602.44,2262.66
  region net VCC: 4598.07,2258.27 4616.82,2258.27 4612.44,2267.02 4602.44,2267.02
Bottom Layer:
  region net VCC: 4833.37,2614.62 4815.74,2590.93 4802.94,2596.81 4824.06,2625.19
  region net TP3_1: 4153.02,2695.24 4153.02,2724.76 4166.8,2715 4166.8,2705
  region net IO35: 4153.02,2155.24 4153.02,2184.76 4166.8,2175 4166.8,2165
  region net IO13: 2604.06,2996.94 2636.94,2964.06 2610.46,2959.85 2599.85,2970.46
  region net IO27: 4526.6,2997.1 4562.1,2961.6 4533.09,2957.48 4522.48,2968.09
  region net IO26: 4426.6,2997.1 4462.1,2961.6 4433.09,2957.48 4422.48,2968.09
  region net IO22(SCL): 2919.06,2986.94 2951.94,2954.06 2925.46,2949.85 2914.85,2960.46
  region net IO21(SDA): 2873.25,2964.5 2826.75,2964.5 2842.5,2942.8 2857.5,2942.8
  region net IO16(BUSY): 2157.48,2304.22 2144.22,2317.48 2151.73,2322.34 2162.34,2311.73
  region net IO17(RST): 2227.48,2324.22 2214.22,2337.48 2221.73,2342.34 2232.34,2331.73
  region net IO19(D/C): 2298.27,2295.62 2298.27,2314.38 2307.02,2312.5 2307.02,2297.5
  region net IO5(CS): 2327.48,2354.22 2314.22,2367.48 2321.73,2372.34 2332.34,2361.73
  region net IO18(CLK): 2373.27,2340.62 2373.27,2359.38 2382.02,2357.5 2382.02,2342.5
  region net IO19(D/C): 2705.78,2342.52 2692.52,2355.78 2687.66,2348.27 2698.27,2337.66
  region net IO18(CLK): 2705.78,2392.52 2692.52,2405.78 2687.66,2398.27 2698.27,2387.66
  region net IO5(CS): 2696.73,2445.62 2696.73,2464.38 2687.98,2462.5 2687.98,2447.5
  region net IO17(RST): 2698.21,2494.51 2695.44,2513.05 2687.05,2509.99 2689.29,2494.99
  region net IO16(BUSY): 2696.75,2540.61 2696.72,2559.36 2687.97,2557.47 2687.99,2542.47
  region net IO13: 2791.73,2805.62 2791.73,2824.38 2782.98,2822.5 2782.98,2807.5
  region net IO21(SDA): 2847.48,2254.22 2834.22,2267.48 2841.73,2272.34 2852.34,2261.73
  region net IO22(SCL): 2867.48,2104.22 2854.22,2117.48 2861.73,2122.34 2872.34,2111.73
  region net U1_25: 3305.62,2081.73 3324.38,2081.73 3322.5,2072.98 3307.5,2072.98
  region net IO4: 3378.27,2025.62 3378.27,2044.38 3387.02,2042.5 3387.02,2027.5
  region net IO4: 4291.73,1875.62 4291.73,1894.38 4282.98,1892.5 4282.98,1877.5
  region net U1_25: 3545.78,1942.48 3532.52,1929.22 3527.66,1936.73 3538.27,1947.34
  region net RXD0: 3018.27,2195.62 3018.27,2214.38 3027.02,2212.5 3027.02,2197.5
  region net TXD0: 2927.48,2154.22 2914.22,2167.48 2921.73,2172.34 2932.34,2161.73
  region net U4_7: 4766.87,2570.51 4766.6,2589.25 4757.88,2587.25 4758.09,2572.25
  region net U4_7: 4766.73,2570.62 4766.73,2589.38 4757.98,2587.5 4757.98,2572.5
  region net U4_7: 4766.73,2570.62 4766.73,2589.38 4757.98,2587.5 4757.98,2572.5
  region net IO2: 2987.48,2580.78 2974.22,2567.52 2981.73,2562.66 2992.34,2573.27
  region net IO34: 3868.27,2400.62 3868.27,2419.38 3877.02,2417.5 3877.02,2402.5
  region net IO34: 4001.73,2400.62 4001.73,2419.38 3992.98,2417.5 3992.98,2402.5
  region net IO35: 3643.29,2296.21 3643.25,2314.96 3652,2313.1 3652.03,2298.1
  region net IO25: 4268.43,2604.23 4268.1,2585.48 4276.88,2587.2 4277.15,2602.2
  region net IO33: 3707.04,2401.64 3696.83,2417.37 3705.09,2420.7 3713.45,2407.84
  region net IO33: 4125.78,2817.52 4112.52,2830.78 4107.66,2823.27 4118.27,2812.66
  region net IO33: 4105.91,2797.65 4092.66,2810.91 4087.79,2803.4 4098.4,2792.79
  region net IO33: 4117.61,2809.35 4104.35,2822.6 4111.86,2827.47 4122.47,2816.86
  region net IO33: 4125.78,2817.52 4112.52,2830.78 4107.66,2823.27 4118.27,2812.66
  region net IO33: 4078.75,2770.5 4065.49,2783.75 4060.63,2776.24 4071.24,2765.63
  region net IO33: 4090.44,2782.19 4077.19,2795.45 4084.7,2800.31 4095.31,2789.7
  region net IO32: 3577.48,2354.22 3564.22,2367.48 3571.73,2372.34 3582.34,2361.73
  region net IO32: 3695.62,2826.73 3714.38,2826.73 3712.5,2817.98 3697.5,2817.98
  region net IO26: 3587.48,2504.22 3574.22,2517.48 3581.73,2522.34 3592.34,2511.73
  region net IO27: 3757.48,2554.22 3744.22,2567.48 3751.73,2572.34 3762.34,2561.73
  region net IO2: 3650.78,2497.52 3637.52,2510.78 3632.66,2503.27 3643.27,2492.66
  region net VCC: 4590.62,2328.27 4609.38,2328.27 4607.5,2337.02 4592.5,2337.02
  region net VCC: 4530.4,1935.62 4530.4,1954.38 4521.65,1955 4521.65,1935
  region net VCC: 4546.94,1935.62 4546.94,1954.38 4555.69,1955 4555.69,1935
  region net VCC: 4508.27,1935.62 4508.27,1954.38 4517.02,1955 4517.02,1935
  region net VCC: 4500.78,1932.52 4487.52,1945.78 4480.9,1940.04 4495.04,1925.9
  region net VCC: 4508.27,1935.62 4508.27,1954.38 4517.02,1955 4517.02,1935
  region net VCC: 4500.78,1932.52 4487.52,1945.78 4480.9,1940.04 4495.04,1925.9
  region net VCC: 4558.98,1935.62 4558.98,1954.38 4550.23,1955 4550.23,1935
  region net RN3_3: 4366.18,2135.55 4334.68,2135.55 4342.9,2154.3 4357.9,2154.3
  region net IO35: 4295.32,2164.09 4263.82,2164.09 4272.1,2184.3 4287.1,2184.3
  region net RN3_3: 4334.68,2144.41 4366.18,2144.41 4357.9,2122.8 4342.9,2122.8
  region net IO35: 4263.82,2175.91 4295.32,2175.91 4287.1,2154.3 4272.1,2154.3
  region net IO35: 4263.82,2195.59 4263.82,2175.91 4241.32,2177.5 4241.32,2192.5
  region net RN3_1: 4366.18,2195.59 4334.68,2195.59 4342.9,2217.2 4357.9,2217.2
  region net TP3_1: 4263.82,2211.58 4295.32,2230.03 4267.56,2239.85 4254.18,2232.01
  region net RN3_1: 4334.68,2204.45 4366.18,2204.45 4357.9,2185.7 4342.9,2185.7
  region net Q3_1: 4299.43,2793.62 4328.97,2793.62 4351.29,2771.12 4330.07,2771.12
  region net Q3_2: 4309.37,2746.38 4279.77,2746.38 4257.51,2768.88 4278.73,2768.88
  region net Q3_2: 4279.77,2718.82 4309.37,2718.82 4285.01,2702.6 4269.1,2707.9
  region net TP3_1: 4201.03,2756.22 4234.35,2756.22 4223.1,2733.72 4208.1,2733.72
  region net IO25: 4420.25,2534.51 4426.04,2570.69 4405.99,2587.82 4403.07,2569.53
  region net Q3_1: 4394.66,2609.31 4400.42,2645.49 4380.36,2662.65 4377.45,2644.34
  region net Q3_2: 4286.22,2687.01 4255.65,2687.01 4266.9,2702.6 4281.9,2702.6
  region net Q3_1: 4322.1,2687.01 4345.53,2657.73 4353.76,2683.45 4344.33,2695.24
  region net Q3_1: 4345.53,2687.01 4345.53,2652.99 4362.4,2662.5 4362.4,2677.5
  region net IO25: 4282.99,2578.78 4282.99,2610.53 4260.49,2602.2 4260.49,2587.2
  region net IO25: 4317.01,2610.53 4317.01,2578.78 4339.51,2587.2 4339.51,2602.2
  region net R1_1: 4983.75,2661.18 4946.25,2661.18 4957.5,2683.68 4972.5,2683.68
  region net R2_1: 4945.32,2511.18 4945.32,2475.75 4936.5,2486 4936.5,2501
  region net VCC: 4945.32,2444.25 4945.32,2408.82 4923.5,2409 4923.5,2444
  region net U4_2: 4688.19,2376.88 4711.81,2376.88 4707.5,2375 4692.5,2375
  region net VCC: 4588.19,2376.88 4611.81,2376.88 4607.5,2354.38 4592.5,2354.38
  region net BAT: 4604.85,2605.88 4588.19,2653.12 4548.54,2607.69 4561.44,2571.09
  region net U4_6: 4638.19,2653.12 4661.81,2636.79 4672.42,2656.81 4659.88,2665.48
  region net U4_7: 4711.81,2637.43 4691.54,2605.88 4712.51,2596.88 4720.81,2609.8
  region net VCC: 4761.81,2605.88 4761.81,2653.12 4774,2647 4774,2612
  region net R1_1: 4983.75,2714.66 4946.25,2714.66 4957.5,2692.16 4972.5,2692.16
  region net U4_6: 4787.9,2759.66 4823.41,2759.66 4792.77,2737.16 4771.56,2737.16
  region net R2_1: 4842.1,2848.83 4806.96,2835.75 4838.8,2823.59 4854.26,2829.35
  region net VCC: 4618.75,2337.72 4591.69,2337.72 4592.5,2360.22 4607.5,2360.22
  region net U4_2: 4779.47,2362.01 4779.47,2327.99 4756.97,2337.5 4756.97,2352.5
  region net BAT: 4420.95,2842.8 4420.95,2805.3 4410,2824.39 4415.3,2840.3
  region net BAT: 4539.05,2666.57 4539.05,2749.7 4590,2679.75 4577.63,2642.63
  region net U3_8: 4603.87,2132.28 4591.69,2154.12 4585.23,2134.9 4590.3,2125.82
  region net VCC: 4383.62,2420.24 4411.18,2371.02 4444.87,2418.32 4427.1,2450.04
  region net POWER: 4308.82,2371.02 4323.35,2420.24 4313.84,2422.04 4300.97,2399.55
  region net BAT: 4346.22,2498.98 4373.78,2449.76 4388.88,2478.53 4367.63,2506.77
  region net VCC: 4318.78,2322.01 4350.53,2287.99 4383.77,2329.32 4359.87,2354.92
  region net VCC: 4441.84,2383.25 4528.16,2305.69 4551.97,2375.93 4517.12,2408.96
  region net VCC: 4528.16,2383.25 4441.84,2383.25 4467.5,2396.7 4502.5,2396.7
  region net POWER: 4441.84,2116.75 4441.84,2197.36 4410,2184 4410,2136
  region net BAT: 4270,2838.11 4270,2825 4267.2,2829.7 4270,2838.11
  region net BAT: 4272.5,2845.61 4270,2838.11 4270,2856.25 4272.5,2845.61
  region net Q3_2: 4208.75,2825 4181.25,2825 4192.5,2820 4207.5,2820
  region net U3_8: 4443.7,2052.6 4443.7,2077.4 4458.7,2070 4458.7,2060
  region net TXD0: 4395.08,2002.6 4395.08,2027.4 4372.58,2022.5 4372.58,2007.5
  region net RXD0: 4395.08,1952.6 4395.08,1977.4 4372.58,1972.5 4372.58,1957.5
  region net VCC: 4443.7,1902.6 4443.7,1927.4 4470,1925 4470,1905
  region net VCC: 4425.75,1902.6 4388.3,1904.61 4373.89,1880.1 4395.1,1880.1

## Silkscreen, mask and mechanical layers (free items; w line width, h text height)
Top Overlay:
  text "SCL" at 2930,2895 h20
  text "3V3" at 3020,2895 h20
  text "GND" at 3125,2895 h20
  text "SDA" at 2835,2890 h20

## Text inside footprints (layer, text, board x,y; h text height)
H1: Top Overlay "-" at 4710,2855 h80; Top Overlay "nc" at 4600,2895 h80 r270; Top Overlay "scl" at 4495,2900 h80 r270; Top Overlay "sda" at 4385,2895 h80 r270; Top Overlay "+" at 4353.28,2871.72 h80 r45